# Altium PCB PCB.PcbDoc
Units mm, origin at the board's own origin, x right, y up, seen from the top; angles counter-clockwise.
Board outline 22.35 x 21.08 mm, 4 copper layers (Top Layer, Internal Plane 1, Internal Plane 2, Bottom Layer); 8 components, 6 nets, 20 pads, 0 vias.
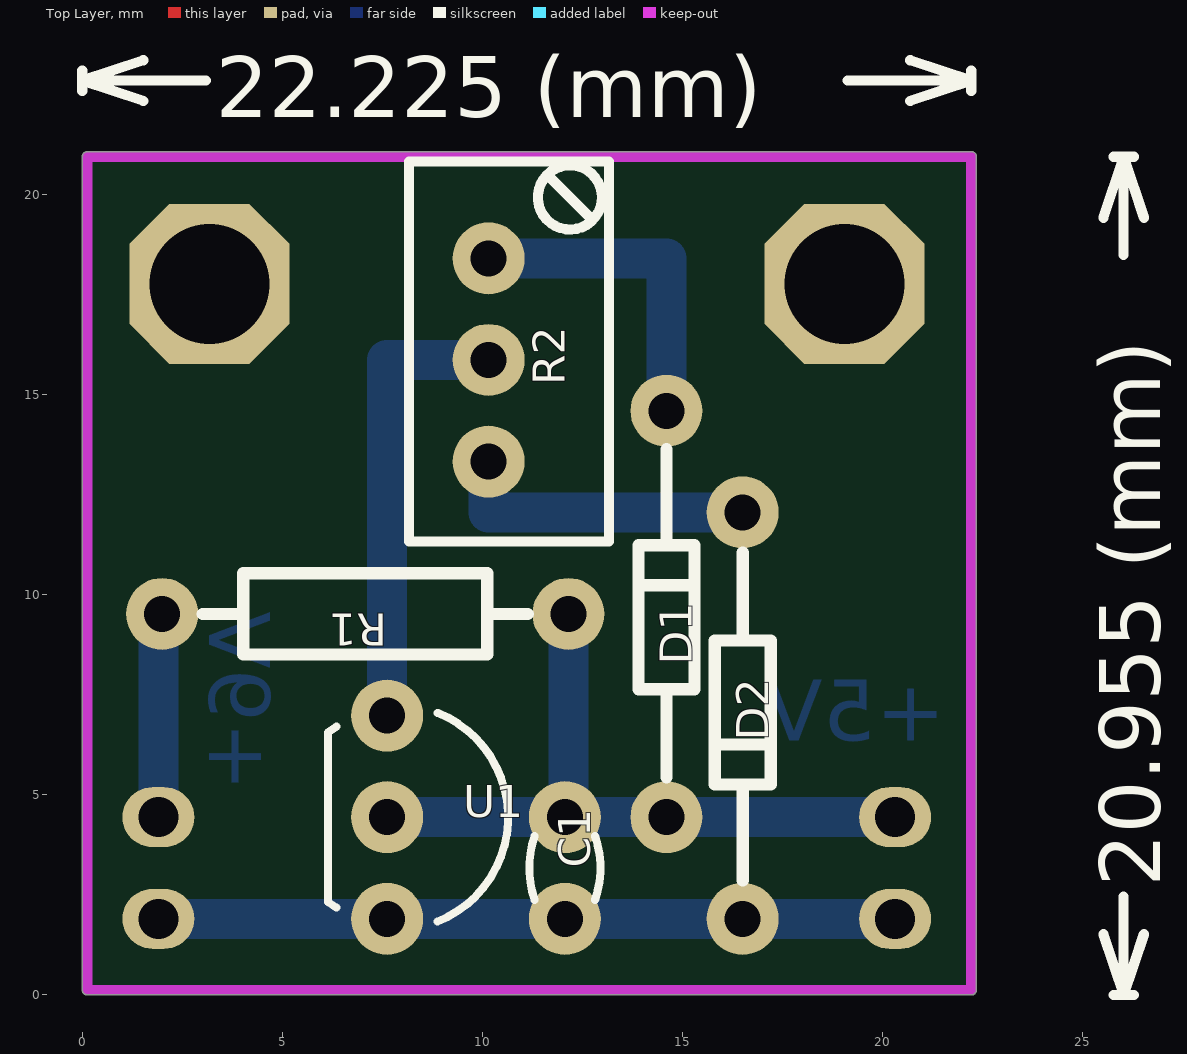
[diagram p0: Top Layer view]
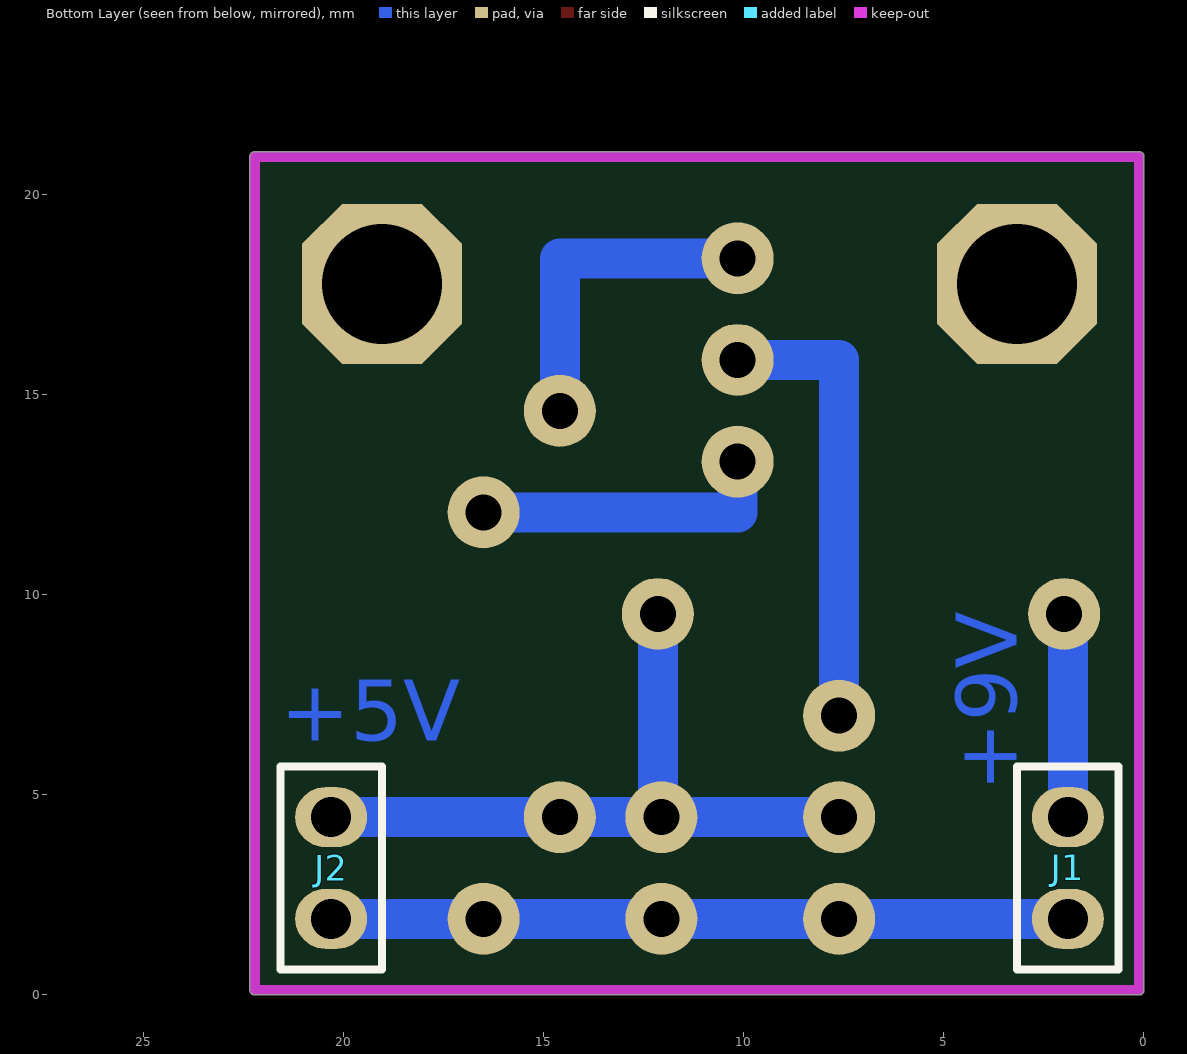
[diagram p1: Bottom Layer view, seen from below]
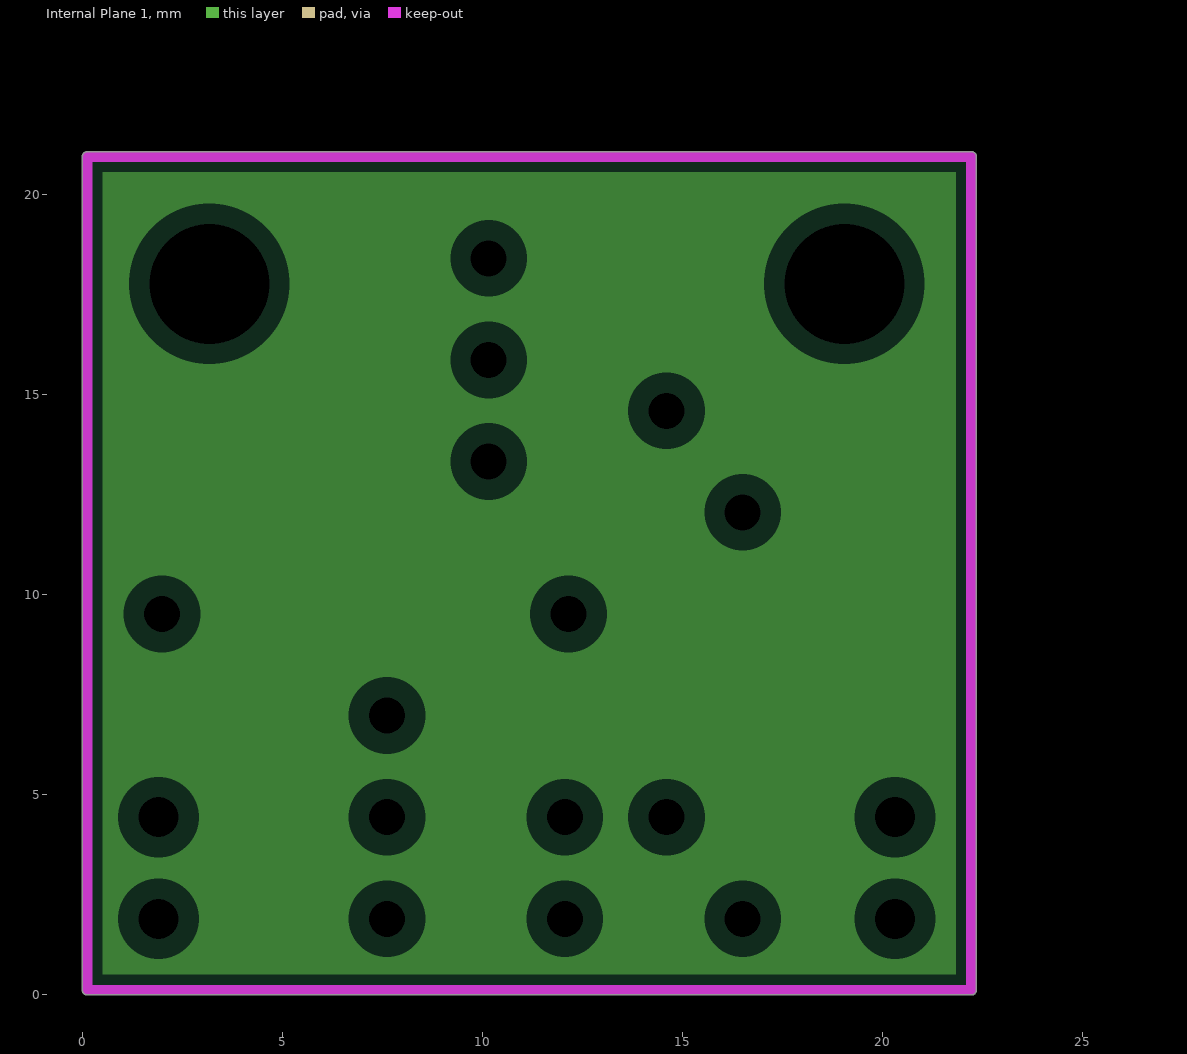
[diagram p2: Internal Plane 1, clearances drawn from the general rule]
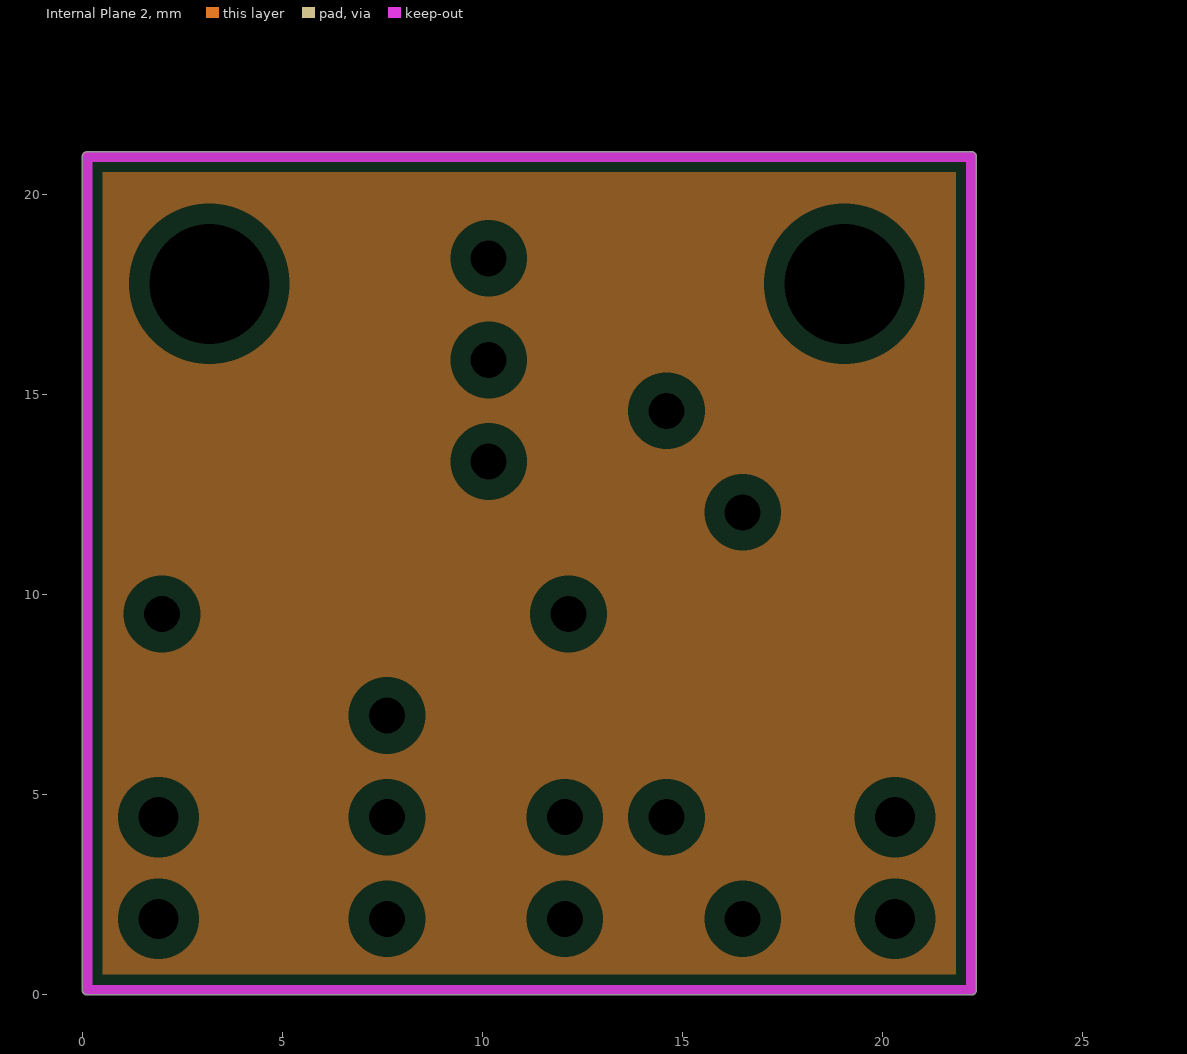
[diagram p3: Internal Plane 2, clearances drawn from the general rule]

## Layer stack, top to bottom
Top Solder: solder mask 0.0102, Solder Resist, Dk 3.5
Top Layer: signal copper 0.0356
Dielectric1: dielectric 0.32, FR-4, Dk 4.8
Internal Plane 1: plane copper 0.0356
Dielectric2: dielectric 0.32, FR-4, Dk 4.8
Internal Plane 2: plane copper 0.0356
Dielectric3: dielectric 0.32, FR-4, Dk 4.8
Bottom Layer: signal copper 0.0356
Bottom Solder: solder mask 0.0102, Solder Resist, Dk 3.5

## Board outline
0.127,0 cw(c0.127,0.127) 0,0.127 0,20.955 cw(c0.127,20.955) 0.127,21.082 22.225,21.082 cw(c22.225,20.955) 22.352,20.955 22.352,0.127 cw(c22.225,0.127) 22.225,0

## Design rules (kind name [scope] priority, off if disabled: settings)
Clearance [All] p1: gap=0.6
ComponentClearance [All] p1: gap=0 collisioncheckmode=3 verticalgap=0 showdistances=FALSE
Height [All] p1: minheight=0 maxheight=50 prefheight=12.7
HoleSize [All] p1: absolutevalues=TRUE maxlimit=5 minlimit=0.025 maxpercent=80.000 minpercent=20.000
PlaneClearance [All] p1: clearance=0.508
PlaneConnect [All] p1: planeconnectstyle=Relief reliefexpansion=0.508 reliefentries=2 reliefconductorwidth=0.254 reliefairgap=0.254
PolygonConnect [All] p1: connectstyle=Direct reliefconductorwidth=0.254 reliefentries=4 polygonreliefangle="90 Angle" airgapwidth=0.254
RoutingVias [All] p1: holewidth=0.813 width=1.575 viastyle="Through Hole" minholewidth=0.711 minwidth=1.27 maxholewidth=0.711 maxwidth=1.27
SilkToSolderMaskClearance SilkscreenOverComponentPads [IsPad] p1: minsilkscreentomaskgap=0.254 clearancetoexposedcopper=TRUE
SolderMaskExpansion [All] p1: expansion=0.102
Width [All] p1: maxlimit=0.5 minlimit=0.254 preferedwidth=0.3
24 further rules are at their usual default settings.

## Components (designator, comment, footprint, x,y, rotation, side; value= is the part's Value field where it differs from the comment)
C1 "Cap" CAPNTO2.54-3.05x1.78A 12.065,3.175 r270 top
D1 "1N4148" DIODE0.4_Glass 14.605,9.525 r90 top
D2 "1N4148" DIODE0.4_Glass 16.51,6.985 r270 top
J1 "2PIN" HDR1X2 1.905,1.905 r90 bottom
J2 "2PIN" HDR1X2 20.32,4.445 r270 bottom
R1 "Res1" AXIAL-0.4 8.255,9.525 r180 top
R2 "POT" VR4_ 10.16,15.875 r90 top
U1 "LM336-5.0" TO92C 7.62,4.445 r0 top

## Footprints (in the part's own frame and the unit in brackets; to place one, negate y for a bottom-side part, rotate by r counter-clockwise, add the part's x,y. Pads: shape width x height; smd on the part's side, far side on the other; paste and mask are expansions set on the pad)
AXIAL-0.4 [mm]
  round 1.8 hole 0.9: 1(-3.9,0) 2(6.26,0)
  silkscreen extent -2.88,-1.02 5.24,1.02, body extent -4.19,-1.19 6.58,1.12, height 3.51
CAPNTO2.54-3.05x1.78A [mm] "Capacitor, Radial, Tantalum, Non-Polarised; Body 3.05 x 1.78 x 3.43 mm (WxTxH max); Pin Spacing 2.54 mm (typ)"
  round 1.8 hole 0.9: 1(-1.27,0) 2(1.27,0)
  silkscreen extent -0.8,-0.89 0.8,0.89
DIODE0.4_Glass [mm] "created by: M.Hariri (designer)"
  round 1.8 hole 0.9: 1(-5.08,0) 2(5.08,0)
  silkscreen extent -4.08,-0.7 4.12,0.7
HDR1X2 [mm]
  oval 1.5x1.8 hole 1: 1(0,0) 2(2.54,0)
  silkscreen extent -1.27,-1.27 3.81,1.27
TO92C [mm]
  round 1.8 hole 0.9: 1(0,2.54) 2(0,0) 3(0,-2.54)
  silkscreen extent -1.48,-2.61 3.02,2.61, body extent -1.52,-2.79 2.68,2.79, height 8
VR4_ [mm]
  round 1.8 hole 0.9: 1(-2.54,0) 2(2.54,0) 3(0,0)
  silkscreen extent -4.54,-3.01 4.96,1.99

## Part data
C1: "Capacitor"
D1 D2: library part Diode, "Default Diode"
J1 J2: library part "Header 2", "Header, 2-Pin"
R1: "Resistor"
R2: library part RPot1, "Potentiometer"
U1: library part LM336, "Programmable Shunt Regulator"

## Free pads (board coordinates)
  oct 4x4 hole 3: 0(3.175,17.78) 0(19.05,17.78)

## Nets (pads, with @x,y where several pads share a name; then routed paths per layer and width w, separated by ;. In a path a pad name is that pad's centre, name@x,y a point inside that pad or via, vN(x,y) a via of type N, cw(c..) or ccw(c..) an arc to the next point about the centre after c; other vN are vias at no path point)
4~6V: C1.1 D1.1 J2.1 R1.1 U1.2 | length 17.7
  Bottom Layer w1: U1.2 C1.1 J2.1 ; C1.1@12.155,4.535 R1.1
+9V: J1.2 R1.2 | length 5.1
  Bottom Layer w1: J1.2 R1.2@1.905,9.525
GND: C1.2 D2.2 J1.1 J2.2 U1.3 | length 18.4
  Bottom Layer w1: J1.1 U1.3 C1.2 J2.2
NetD1_2: D1.2 R2.2 | length 8.3
  Bottom Layer w1: R2.2 14.605,18.415 D1.2
NetD2_1: D2.1 R2.1 | length 7.6
  Bottom Layer w1: R2.1 10.16,12.065 D2.1
NetR2_3: R2.3 U1.1 | length 11.4
  Bottom Layer w1: U1.1 7.62,15.875 R2.3

## Polygon pours and split planes (outlines as drawn)
no net on Internal Plane 1 (split plane): 21.842,0.51 0.51,0.51 0.51,20.572 21.842,20.572
no net on Internal Plane 2 (split plane): 21.842,0.51 0.51,0.51 0.51,20.572 21.842,20.572

## Keep-outs
Keep-Out Layer:
  lines w0.254: 0.127,0.127 22.225,0.127 22.225,20.955 0.127,20.955 0.127,0.127

## Other copper
Bottom Layer:
  text "+5V" at 21.59,6.35 h1.52
  text "+9V" at 3.175,5.08 h1.52 r270

## Silkscreen, mask and mechanical layers (free items; w line width, h text height)
Top Overlay:
  lines w0.254: 0,22.606 0,23.114 ; 1.524,22.352 0,22.86 ; 1.524,23.368 0,22.86 ; 3.089,22.86 0,22.86 ; 19.136,22.86 22.225,22.86 ; 20.701,22.352 22.225,22.86 ; 20.701,23.368 22.225,22.86 ; 22.225,22.606 22.225,23.114 ; 25.527,1.524 26.035,0 ; 25.527,19.431 26.035,20.955 ; 25.781,0 26.289,0 ; 25.781,20.955 26.289,20.955 ; 26.035,2.454 26.035,0 ; 26.035,18.501 26.035,20.955 ; 26.543,1.524 26.035,0 ; 26.543,19.431 26.035,20.955
  text "22.225 (mm)" at 3.343,21.946 h1.52
  text "20.955 (mm)" at 26.949,2.708 h1.52 r90